# Altium PCB LP_ECG-X02.PcbDoc (part 1 of 2)
Units mil, origin at the board's own origin, x right, y up, seen from the top; angles counter-clockwise.
Board outline 960.05 x 640 mil, 2 copper layers (Top Layer, Bottom Layer), stack 5.556 mil thick; 71 components, 50 nets, 250 pads, 54 vias.
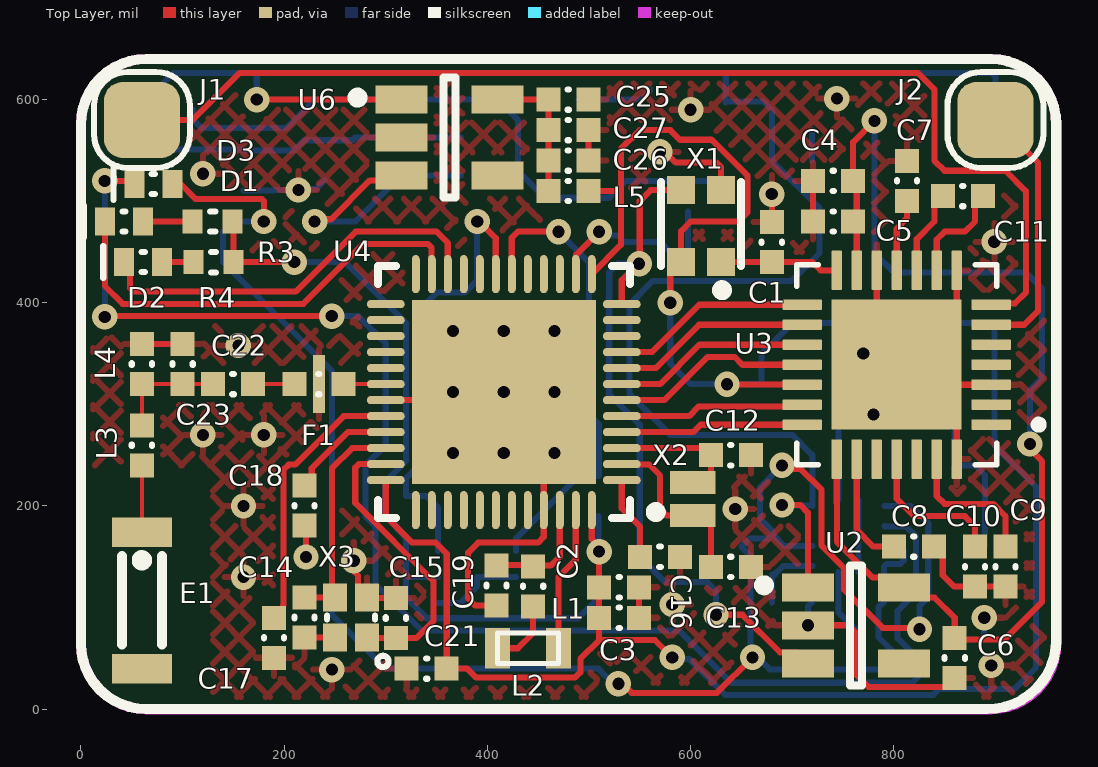
[diagram p0: Top Layer view]
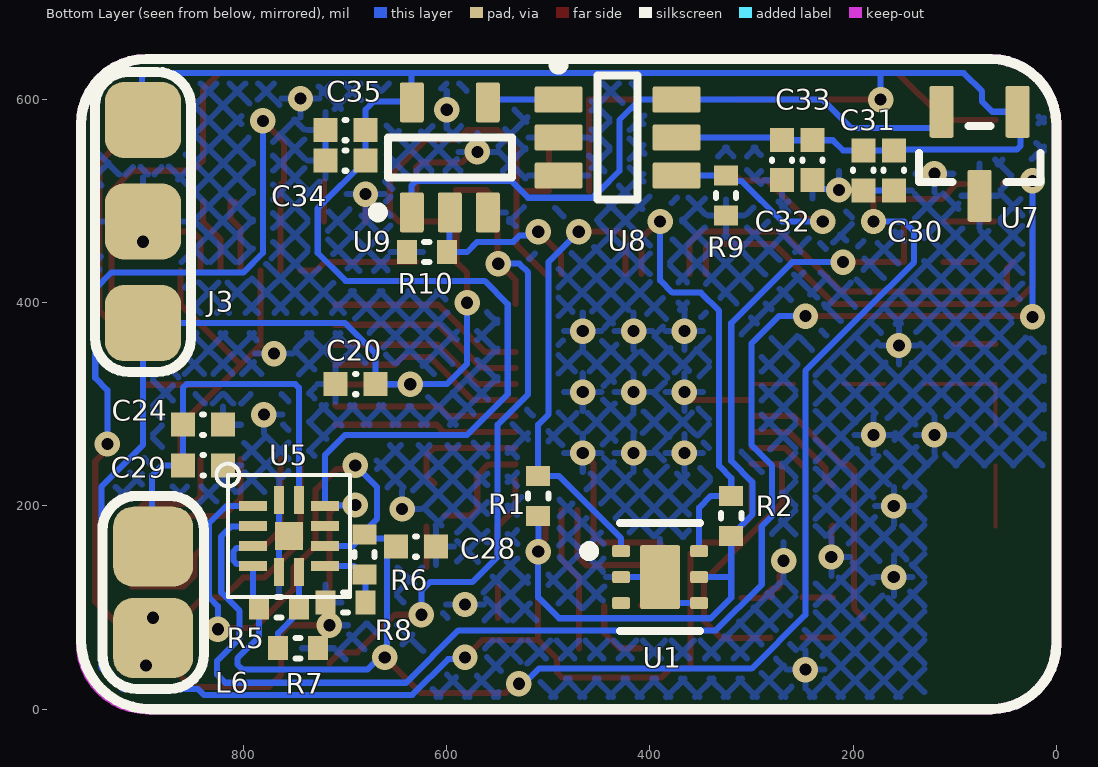
[diagram p1: Bottom Layer view, seen from below]
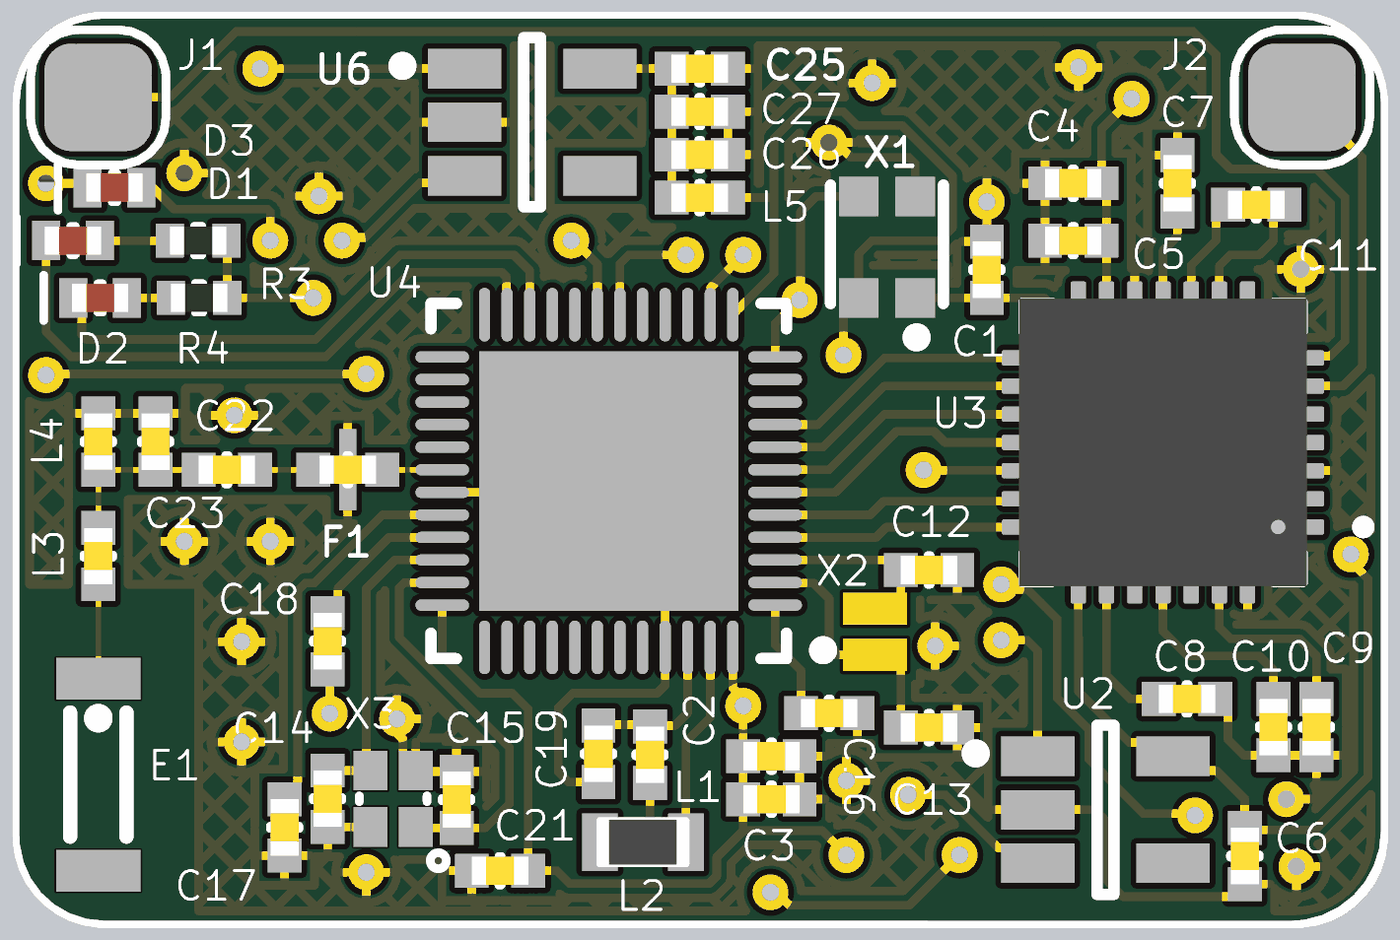
[diagram p2: 3D render of the assembled board from above, using the file's embedded part models]
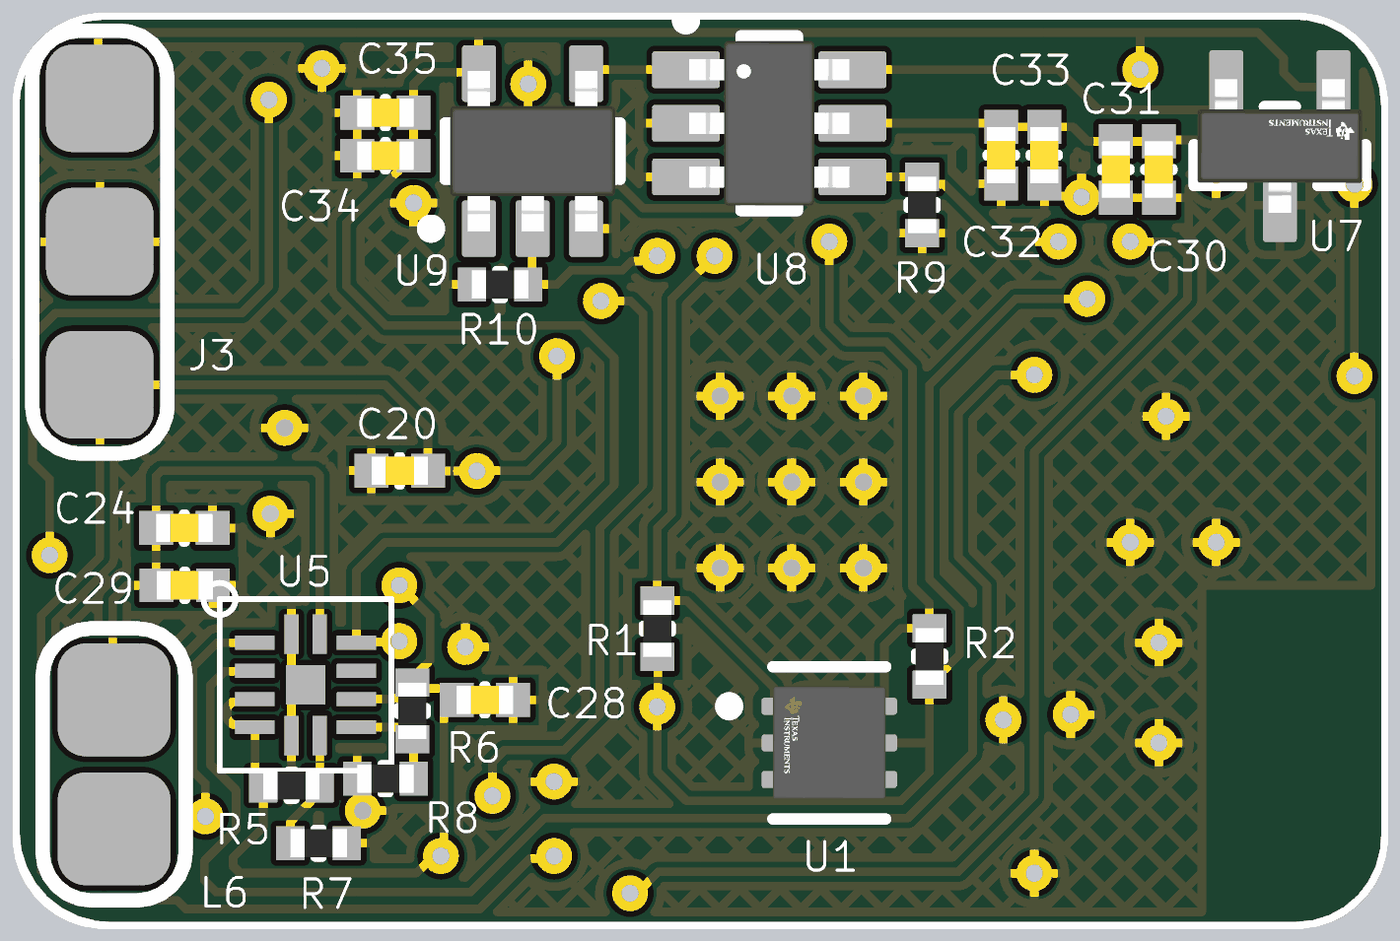
[diagram p3: 3D render of the assembled board from below, using the file's embedded part models]

## Layer stack, top to bottom
Top Solder: solder mask 1, SM-001, Dk 4
Top Layer: signal copper 1.378
Dielectric 1: prepreg 2.8, PP-006, Dk 4.1
Bottom Layer: signal copper 1.378
Bottom Solder: solder mask 1, SM-001, Dk 4

## Board outline
64.49,0 cw(c64.49,64.49) 0,64.49 0,575.51 cw(c64.49,575.51) 64.49,640 895.55,640 cw(c895.59,575.55) 960.05,575.59 960,64.49 cw(c895.51,64.49) 895.51,0

## Design rules (kind name [scope] priority, off if disabled: settings)
Clearance [All] p1: gap=6 ignorepadtopadclearanceinfootprint=FALSE except(4: Arc-Arc Arc-Track Arc-Fill Arc-Poly Arc-Region Track-Track Track-Fill Track-Poly Track-Region Fill-Fill Fill-Poly Fill-Region Poly-Poly Poly-Region Region-Region)
ComponentClearance [All] p1: gap=0 collisioncheckmode=3 verticalgap=100000 showdistances=FALSE
DiffPairsRouting [All] p1: maxlimit=10 minlimit=10 mostfreqgap=10 substack1={09ACA8DF-FEF3-4045-BFE0-9274A49A609C} toplayer_{09aca8df-fef3-4045-bfe0-9274a49a609c}_minwidth=15 toplayer_{09aca8df-fef3-4045-bfe0-9274a49a609c}_maxwidth=15 toplayer_{09aca8df-fef3-4045-bfe0-9274a49a609c}_prefwidth=15 bottomlayer_{09aca8df-fef3-4045-bfe0-9274a49a609c}_minwidth=15 bottomlayer_{09aca8df-fef3-4045-bfe0-9274a49a609c}_maxwidth=15 bottomlayer_{09aca8df-fef3-4045-bfe0-9274a49a609c}_prefwidth=15 toplayer_minwidth=15 toplayer_maxwidth=15 toplayer_prefwidth=15 bottomlayer_minwidth=15 bottomlayer_maxwidth=15 bottomlayer_prefwidth=15 substack2={F83B83AE-013F-46B0-B20B-87D2642F3418} toplayer_{f83b83ae-013f-46b0-b20b-87d2642f3418}_minwidth=15 toplayer_{f83b83ae-013f-46b0-b20b-87d2642f3418}_maxwidth=15 toplayer_{f83b83ae-013f-46b0-b20b-87d2642f3418}_prefwidth=15 bottomlayer_{f83b83ae-013f-46b0-b20b-87d2642f3418}_minwidth=15 bottomlayer_{f83b83ae-013f-46b0-b20b-87d2642f3418}_maxwidth=15 bottomlayer_{f83b83ae-013f-46b0-b20b-87d2642f3418}_prefwidth=15 maxuncoupledlength=500
HoleSize [All] p1: absolutevalues=TRUE maxlimit=200 minlimit=12 maxpercent=80.000 minpercent=20.000
MinimumSolderMaskSliver [All] p1: minsoldermaskwidth=6
PlaneClearance [All] p1: clearance=6
PlaneConnect [All] p1: planeconnectstyle=Relief reliefexpansion=6 reliefentries=4 reliefconductorwidth=6 reliefairgap=6
PolygonConnect [All] p1: connectstyle=Relief reliefconductorwidth=6 reliefentries=4 polygonreliefangle="90 Angle" airgapwidth=6
RoutingVias [All] p1: holewidth=16 width=30 viastyle="Through Hole" minholewidth=12 minwidth=12 maxholewidth=100 maxwidth=50
SilkToSilkClearance [All] p1: silktosilkclearance=6
SilkToSolderMaskClearance [IsPad] p1: minsilkscreentomaskgap=6 clearancetoexposedcopper=TRUE
SolderMaskExpansion [All] p1: expansion=4 istentingtop=FALSE
UnRoutedNet [All] p1: checkbadconnections=TRUE
Width [All] p1: maxlimit=200 minlimit=4 preferedwidth=6 substack1={09ACA8DF-FEF3-4045-BFE0-9274A49A609C} toplayer_{09aca8df-fef3-4045-bfe0-9274a49a609c}_minwidth=5.9 bottomlayer_{09aca8df-fef3-4045-bfe0-9274a49a609c}_minwidth=5.9 substack2={F83B83AE-013F-46B0-B20B-87D2642F3418} toplayer_{f83b83ae-013f-46b0-b20b-87d2642f3418}_minwidth=5.9 bottomlayer_{f83b83ae-013f-46b0-b20b-87d2642f3418}_minwidth=5.9
21 further rules are at their usual default settings.

## Classes and differential pairs
component class LP_ECG_ECG-X02: C1 C2 C3 C4 C5 C6 C7 C8 C9 C10 C11 J1 J2 U1 U2 U3 X1
component class LP_ECG_Power-X02: C24 C25 C26 C27 C28 C29 C30 C31 C32 C33 C34 C35 D3 J3 L5 L6 R5 R6 R7 R8 R9 R10 U5 U6 U7 U8 U9
component class LP_ECG_Main-X02: C12 C13 C14 C15 C16 C17 C18 C19 C20 C21 C22 C23 D1 D2 E1 F1 L1 L2 L3 L4 R1 R2 R3 R4 U4 X2 X3

## Components (designator, comment, footprint, x,y, rotation, side; value= is the part's Value field where it differs from the comment)
C1 "10pF" C0402 680,459.69 r90 top
C2 "1uF" C0402 529.68,120 r0 top
C3 "100nF" C0402 529.68,90 r180 top
C4 "1uF" C0402 740.32,520 r180 top
C5 "100nF" C0402 740.32,480 r0 top
C6 "10uF" C0402 860,50.31 r270 top
C7 "1nF" C0402 813,520 r270 top
C8 "10uF" C0402 819.68,160 r0 top
C9 "1uF" C0402 910,140.31 r270 top
C10 "10uF" C0402 880,140.31 r270 top
C11 "1uF" C0402 868,505 r180 top
C12 "20pF" C0402 639.68,250 r180 top
C13 "20pF" C0402 639.68,140 r180 top
C14 "12pF" C0402 220,90.31 r270 top
C15 "12pF" C0402 310,89.69 r90 top
C16 "100nF" C0402 570,150 r0 top
C17 "100pF" C0402 190,70.31 r270 top
C18 "100pF" C0402 220,200.31 r270 top
C19 "1uF" C0402 409,121.69 r90 top
C20 "10uF" C0402 689.68,320 r0 bottom
C21 "100nF" C0402 340.31,40 r180 top
C22 "1pF" C0402 149.69,320 r180 top
C23 "" C0402 100,339.69 r90 top
C24 "47nF" C0402 840,280 r180 bottom
C25 "10uF" C0402 479.69,600 r0 top
C26 "1uF" C0402 479.69,540 r0 top
C27 "100nF" C0402 479.69,570 r180 top
C28 "4.7uF" C0402 630.32,160 r180 bottom
C29 "6.8nF" C0402 839.68,240 r180 bottom
C30 "1uF" C0402 160,530.32 r270 bottom
C31 "100nF" C0402 190,530.32 r90 bottom
C32 "1uF" C0402 270,540.32 r270 bottom
C33 "100nF" C0402 240,540.32 r90 bottom
C34 "1uF" C0402 699.68,540 r0 bottom
C35 "100nF" C0402 699.68,570 r180 bottom
D1 "Orange" LED_0402 42.37,480 r180 top
D2 "Red" LED_0402 61.3,440 r180 top
D3 "Yellow" LED_0402 71.3,517 r180 top
E1 "2450AT18B100" 2450AT18B100 60,174.1 r270 top
F1 "2450FM07A0029" 2450FM07A0029 234.11,320 r180 top
J1 "ECG_SMD_CONNECTOR" ECG_CONNECTOR 60,580 r0 top
J2 "ECG_SMD_CONNECTOR" ECG_CONNECTOR 900,580 r0 top
J3 "SMD CONNECTOR FOR 40 mAh BATTERY" BATTERY_CONNECTOR 899,580 r270 bottom
L1 "15nH" L0402 445,121 r270 top
L2 "10uH" L0603 440,60 r0 top
L3 "0.0039uH" L0402 60,259.69 r270 top
L4 "0.0027uH" L0402 60,339.69 r270 top
L5 "1uH" L0402 479.69,510 r0 top
L6 "WIRELESS CHARGING COIL, RECEIVER" 760308101219 889,160 r180 bottom
R1 "10kR" R0402 510,209.69 r90 bottom
R2 "10kR" R0402 320,190.31 r90 bottom
R3 "422R" R0402 129.69,480 r180 top
R4 "422R" R0402 130.31,440 r180 top
R5 "0R" R0402 765.28,100.31 r180 bottom
R6 "0R" R0402 681,152.31 r90 bottom
R7 "0R" R0402 746.32,60 r180 bottom
R8 "0R" R0402 699.68,105 r0 bottom
R9 "1MR" R0402 325.2,505.51 r270 bottom
R10 "1MR" R0402 619.68,450 r180 bottom
U1 "TMP117AIDRVR" TMP117AIDRVR 390,130 r270 bottom
U2 "S-1318A18-M5T1U4" SOT-23-5 762.76,82.6 r0 top
U3 "MAX30003CTI+" QFN50P500X500X80-29N 802.91,339.06 r180 top
U4 "NRF52832-QFAA-R7" NRF52832-QFAA-R7 416.14,312.13 r0 top
U5 "LTC4124" 12-LQFN 755.43,170.47 r180 bottom
U6 "S-1318A30-M5T1U4" SOT-23-5 362.76,562.6 r0 top
U7 "DRV5032FBDBZR" FP-DBZ0003A-MFG 75.6,546.66 r270 bottom
U8 "SN74LVC1G57DBVR" DBV0006A_M 431.93,562.6 r180 bottom
U9 "SN74LVC1G80DBVR" DBV0005A_N 597,543.13 r90 bottom
X1 "OSCILLATOR-32.768KHZ" OM-7605-C8-32.768KHZ 610.32,475.43 r90 top
X2 "32.768 kHz" CRYSTAL_1MM2_X_1MM0 602,206.86 r270 top
X3 "32MHz" CRYSTAL_1MM6_X_1MM2 265.75,90.31 r90 top

## Footprints (in the part's own frame and the unit in brackets; to place one, negate y for a bottom-side part, rotate by r counter-clockwise, add the part's x,y. Pads: shape width x height; smd on the part's side, far side on the other; paste and mask are expansions set on the pad)
12-LQFN [mm] "12-LQFN Exposed Pad"
  rect 0.7x0.25 smd: 1(-0.9,0.75) 2(-0.9,0.25) 3(-0.9,-0.25) 4(-0.9,-0.75) 7(0.9,-0.75) 8(0.9,-0.25) 9(0.9,0.25) 10(0.9,0.75)
  rect 0.25x0.7 smd: 5(-0.25,-0.9) 6(0.25,-0.9) 11(0.25,0.9) 12(-0.25,0.9)
  rect 0.7x0.7 smd: 13(0,0)
  silkscreen extent -1.81,-1.52 1.52,1.81, body extent -1.02,-1.02 1.02,1.02, height 0.25
2450AT18B100 [mm] "2.4GHz Mini Antenna SMD, 50 ohm Resistence"
  rect 0.74x1.5 smd mask+0.03: 1(0,0) 2(3.406,0)
  silkscreen extent 0.57,-0.5 2.8,0.5, body extent -0.05,-0.9 3.35,0.9, height 1.4
2450FM07A0029 [mm] "Ultra Miniature 2.45 GHz Impedance Matched Low Pass Filter for nRF52832"
  rect 0.6x0.6 smd: 1(-0.613,0) 2(0.613,0)
  rect 0.3x1.45 smd: 3(0,0)
  silkscreen extent -0.02,-0.25 0.02,0.25, body extent -0.5,-0.25 0.5,0.25, height 0.55
760308101219 [mm] "WE-WPCC WIRELESS POWER TRANSFER RECEIVER COIL"
  rrect50% 2x2 smd: 1(0,0) 2(0,-2.286)
  silkscreen extent -1.27,-3.56 1.27,1.27
BATTERY_CONNECTOR [mil] "SMD Battery connector"
  rrect50% 75x75 smd: 1(0,0) 2(100,0) 3(200,0)
  silkscreen extent -47,-47 248,47
C0402 [mm]
  rect 0.6x0.6 smd: 1(-0.5,0) 2(0.5,0)
  silkscreen extent -0.02,-0.25 0.02,0.25, body extent -0.5,-0.25 0.5,0.25, height 0.55
CRYSTAL_1MM2_X_1MM0 [mm] "Crystal 1.2 x 1.0 x 0.35mm"
  rect 0.575x1.14 smd paste-0.5 mask+0.06: 1(-0.41,0) 2(0.41,0)
  body extent -0.6,-0.5 0.6,0.5, height 0.35
CRYSTAL_1MM6_X_1MM2 [mm] "1.6 x 1.2 x 0.35mm 4-pin crystal"
  rect 0.7x0.6 smd mask+0.036: 1(-0.5,-0.4) 2(0.5,-0.4) 3(0.5,0.4) 4(-0.5,0.4)
  silkscreen extent -1.24,-0.94 0.05,0.6, body extent -0.8,-0.6 0.8,0.6, height 0.35
DBV0005A_N [mm] "SOT23, 5-Leads, Body 3.05x1.75mm, Pitch 0.95mm, IPC Medium Density"
  rrect17% 1x0.6 smd: 1(-1.375,0.95) 2(-1.375,0) 3(-1.375,-0.95) 4(1.375,-0.95) 5(1.375,0.95)
  silkscreen extent -1.5,-1.55 0.5,1.93, body extent -1.42,-1.46 1.42,1.46, height 1.08
DBV0006A_M [mm] "SOT23, 6-Leads, Body 3.05x1.75mm, Pitch 0.95mm, IPC Low Density"
  rrect15% 1.2x0.65 smd: 1(-1.475,0.95) 2(-1.475,0) 3(-1.475,-0.95) 4(1.475,-0.95) 5(1.475,0) 6(1.475,0.95)
  silkscreen extent -1.6,-1.55 0.5,1.95, body extent -1.42,-1.46 1.42,1.46, height 1.11
ECG_CONNECTOR [mil] "Surface Mount ECG Connector"
  rrect50% 75x75 smd: 1(0,0)
  silkscreen extent -47,-47 47,47
FP-DBZ0003A-MFG [mm]
  rrect17% 1.3x0.6 smd paste+0 mask+0: 1(-1.05,0.95) 2(-1.05,-0.95) 3(1.05,0)
  silkscreen extent -0.7,-1.52 0.7,1.52, body extent -1.18,-1.46 1.18,1.46, height 1.12
L0402 [mm]
  rect 0.6x0.6 smd: 1(-0.5,0) 2(0.5,0)
  silkscreen extent -0.02,-0.25 0.02,0.25, body extent -0.5,-0.25 0.5,0.25, height 0.55
L0603 [mil] "surface mount inductor 0603"
  rect 25x40 smd: 1(-30,0) 2(30,0)
  silkscreen extent -30,-15 30,15, body extent -31,-16 32,16, height 39
LED_0402 [mm] "0402 w/ LED mark"
  rect 0.5x0.7 smd: A(-0.475,0) K(0.475,0)
  silkscreen extent -0.04,-0.4 1,0.4, body extent -0.5,-0.25 0.5,0.25, height 0.35
NRF52832-QFAA-R7 [mm]
  oval 0.95x0.2 smd: 1(2.95,-2.2) 2(2.95,-1.8) 3(2.95,-1.4) 4(2.95,-1) 5(2.95,-0.6) 6(2.95,-0.2) 7(2.95,0.2) 8(2.95,0.6) 9(2.95,1) 10(2.95,1.4) 11(2.95,1.8) 12(2.95,2.2) 25(-2.95,2.2) 26(-2.95,1.8) 27(-2.95,1.4) 28(-2.95,1) 29(-2.95,0.6) 30(-2.95,0.2) 31(-2.95,-0.2) 32(-2.95,-0.6) 33(-2.95,-1) 34(-2.95,-1.4) 35(-2.95,-1.8) 36(-2.95,-2.2)
  oval 0.2x0.95 smd: 13(2.2,2.95) 14(1.8,2.95) 15(1.4,2.95) 16(1,2.95) 17(0.6,2.95) 18(0.2,2.95) 19(-0.2,2.95) 20(-0.6,2.95) 21(-1,2.95) 22(-1.4,2.95) 23(-1.8,2.95) 24(-2.2,2.95) 37(-2.2,-2.95) 38(-1.8,-2.95) 39(-1.4,-2.95) 40(-1,-2.95) 41(-0.6,-2.95) 42(-0.2,-2.95) 43(0.2,-2.95) 44(0.6,-2.95) 45(1,-2.95) 46(1.4,-2.95) 47(1.8,-2.95) 48(2.2,-2.95)
  rect 4.6x4.6 smd: 49(0,0)
  silkscreen extent -3.15,-3.15 3.92,3.15, body extent -3,-3 3,3, height 0.9
OM-7605-C8-32.768KHZ [mm] "2.0 MM X 1.2 MM X 0.7 MM, 4-SMD"
  rect 0.7x0.7 smd paste+0 mask+0: 1(-0.9,-0.5) 2(0.9,-0.5) 3(0.9,0.5) 4(-0.9,0.5)
  silkscreen extent -1.72,-1 1.1,1, body extent -1.01,-0.6 1.01,0.6, height 0.7
QFN50P500X500X80-29N [mm]
  rrect25% 0.99x0.27 smd: 1(-2.36,1.5) 2(-2.36,1) 3(-2.36,0.5) 4(-2.36,0) 5(-2.36,-0.5) 6(-2.36,-1) 7(-2.36,-1.5) 15(2.36,-1.5) 16(2.36,-1) 17(2.36,-0.5) 18(2.36,0) 19(2.36,0.5) 20(2.36,1) 21(2.36,1.5)
  rrect25% 0.27x0.99 smd: 8(-1.5,-2.36) 9(-1,-2.36) 10(-0.5,-2.36) 11(0,-2.36) 12(0.5,-2.36) 13(1,-2.36) 14(1.5,-2.36) 22(1.5,2.36) 23(1,2.36) 24(0.5,2.36) 25(0,2.36) 26(-0.5,2.36) 27(-1,2.36) 28(-1.5,2.36)
  rect 3.25x3.25 smd paste-3: 29(0,0)
  silkscreen extent -3.65,-2.5 2.5,2.5, body extent -2.55,-2.55 2.55,2.55, height 0.81
R0402 [mm]
  rect 0.5x0.6 smd: 1(-0.5,0) 2(0.5,0)
  silkscreen extent -0.06,-0.25 0.06,0.25, body extent -0.5,-0.25 0.5,0.25, height 0.35
SOT-23-5 [mm] "SOT23, 5-Leads, Body 2.9x1.6mm, Pitch 0.95mm, Lead Span 2.8mm, IPC Low Density"
  rect 1.3x0.7 smd: 1(-1.2,0.95) 2(-1.2,0) 3(-1.2,-0.95) 4(1.2,-0.95) 5(1.2,0.95)
  silkscreen extent -2.42,-1.5 0.15,1.5, body extent -0.83,-1.49 0.83,1.5, height 1.19
TMP117AIDRVR [mm]
  rrect33% 0.3x0.45 smd paste+0 mask+0: 1(-0.65,-0.975) 2(0,-0.975) 3(0.65,-0.975) 4(0.65,0.975) 5(0,0.975) 6(-0.65,0.975)
  rrect10% 1.6x1 smd paste-1000 mask+0: 7(0,0)
  silkscreen extent -1.35,-1.9 1.35,1, body extent -1,-1 1,1, height 0.8

## Part data
C1: library part C-0402(1005), "Ceramic Capacitor, Multilayer, Ceramic, 50V, 5% +Tol, 5% -Tol, C0G, 30ppm/Cel TC, 0.00001uF, Surface Mount, 0402", Capacitor Type=Ceramic, Manufacturer=Murata, Manufacturer Part Number=GJM1555C1H100JB01D, Max Operating Temperature=125°C, Min Operating Temperature=-55°C, Negative Tolerance=5%, Package Shape=Rectangular, Package Style=SMTMeter, Rated DC Voltage (URdc)=50V, Supplier Part Number 1=490-3113-1-ND, Temperature Characteristics Code=C0G, Capacitance=10pF, Category="Ceramic Capacitors", ComponentLink1Description=https://datasheet.ciiva.com:443/pdfs/VipMasterIC/IC/MURE/MURE-S-A0004378008/MURE-S-A0004383508-1.pdf?src-supplier=IHS+Markit, ComponentLink1URL=https://datasheet.ciiva.com:443/pdfs/VipMasterIC/IC/MURE/MURE-S-A0004378008/MURE-S-A0004383508-1.pdf?src-supplier=IHS+Markit, ComponentLink2Description=https://datasheet.ciiva.com/18183/getdatasheetpartid-228488-18183804.pdf?src-supplier=Verical, ComponentLink2URL=https://datasheet.ciiva.com/18183/getdatasheetpartid-228488-18183804.pdf?src-supplier=Verical, ComponentLink3Description=https://datasheet.ciiva.com/165/partnumbering-e-01-165051.pdf?src-supplier=Digi-Key, ComponentLink3URL=https://datasheet.ciiva.com/165/partnumbering-e-01-165051.pdf?src-supplier=Digi-Key, ComponentLink4Description=https://datasheet.ciiva.com/29542/partnumbering-e-01-29542760.pdf?src-supplier=Digi-Key, ComponentLink4URL=https://datasheet.ciiva.com/29542/partnumbering-e-01-29542760.pdf?src-supplier=Digi-Key, ComponentLink5Description=https://datasheet.ciiva.com/29542/partnumbering-e-01-29542761.pdf?src-supplier=Digi-Key, ComponentLink5URL=https://datasheet.ciiva.com/29542/partnumbering-e-01-29542761.pdf?src-supplier=Digi-Key, ComponentLink6Description=https://datasheet.ciiva.com/11607/product-11607356.pdf?src-supplier=Avnet, ComponentLink6URL=https://datasheet.ciiva.com/11607/product-11607356.pdf?src-supplier=Avnet, Dielectric Material=Ceramic, Height=0.5mm, JESD-609 Code=e3, Length=1mm, Mount="Surface Mount", Multilayer=Yes, Number of Pins=2, Packaging="Tape and Reel", Positive Tolerance=5%, Pricing 1="1=0.25000, 10=0.17200, 50=0.10300, 100=0.08690, 500=0.05948, 1000=0.05262, 2500=0.05034, 5000=0.04576 (USD)", REACH SVHC=Yes, RoHS=Yes, RoHS Compliant=Yes, Size Code=0402, Stock 1=1065586, Supplier 1=Digi-Key, Terminal Finish=Nickel, Termination=Wraparound, Width=0.5mm
C2 C4 C9 C11 C19 C26 C30 C32 C34: library part C-0402(1005), "Ceramic Capacitor, Multilayer, Ceramic, 6.3V, 20% +Tol, 20% -Tol, X5R, 15% TC, 1uF, Surface Mount, 0402", Case Code (Imperial)=0402, Case Code (Metric)=1005, Dielectric=X5R, Manufacturer=Yageo, Manufacturer Part Number=CC0402MRX5R5BB105, Max Operating Temperature=85°C, Min Operating Temperature=-55°C, Package Quantity=1, Supplier Part Number 1=311-1441-1-ND, Tolerance=20%, Voltage Rating=6.3V, Capacitance=1uF, Case/Package=0402, Category="Ceramic Capacitors", ComponentLink1Description=https://datasheet.ciiva.com/169/product-169683.pdf, ComponentLink1URL=https://datasheet.ciiva.com/169/product-169683.pdf, ComponentLink2Description=https://datasheet.ciiva.com:443/pdfs/VipMasterIC/IC/YAGO/YAGO-S-A0006851646/YAGO-S-A0006851646-1.pdf?src-supplier=IHS+Markit, ComponentLink2URL=https://datasheet.ciiva.com:443/pdfs/VipMasterIC/IC/YAGO/YAGO-S-A0006851646/YAGO-S-A0006851646-1.pdf?src-supplier=IHS+Markit, ComponentLink3Description=https://datasheet.ciiva.com/176/mlccorderingcode-176806.pdf?src-supplier=Digi-Key, ComponentLink3URL=https://datasheet.ciiva.com/176/mlccorderingcode-176806.pdf?src-supplier=Digi-Key, ComponentLink4Description=https://datasheet.ciiva.com/176/mlccorderingcode-176807.pdf?src-supplier=Digi-Key, ComponentLink4URL=https://datasheet.ciiva.com/176/mlccorderingcode-176807.pdf?src-supplier=Digi-Key, ComponentLink5Description=https://datasheet.ciiva.com/176/mlccorderingcode-176808.pdf?src-supplier=Digi-Key, ComponentLink5URL=https://datasheet.ciiva.com/176/mlccorderingcode-176808.pdf?src-supplier=Digi-Key, Composition=Ceramic, Depth=0.5mm, Dissipation Factor=10%, Halogen Free="Halogen Free", Height=0.5mm, Lead Free="Lead Free", Length=1mm, Mount="Surface Mount", Number of Pins=2, Packaging="Tape and Reel", Pricing 1="1=0.13000, 10=0.08900, 100=0.04200, 500=0.02946, 1000=0.02439, 2500=0.02270, 5000=0.02076 (USD)", RoHS=Yes, Stock 1=16697, Supplier 1=Digi-Key, Termination=SMD/SMT, Thickness=0.022inch, Voltage Rating (DC)=6.3V, Width=0.5mm
C3 C5 C16 C27 C31 C33 C35: library part C-0402(1005), "Ceramic Capacitor, Multilayer, Ceramic, 25V, 10% +Tol, 10% -Tol, X5R, 15% TC, 0.1uF, Surface Mount, 0402", Case Code (Imperial)=0402, Case Code (Metric)=1005, Dielectric=X5R, Manufacturer="Taiyo Yuden", Manufacturer Part Number=TMK105BJ104KV-F, Max Operating Temperature=85°C, Min Operating Temperature=-55°C, Package Quantity=1, Supplier Part Number 1=587-1456-1-ND, Tolerance=10%, Voltage=25V, Capacitance=100nF, Case/Package=0402, Category="Ceramic Capacitors", ComponentLink1Description=https://datasheet.ciiva.com/169/product-169683.pdf, ComponentLink1URL=https://datasheet.ciiva.com/169/product-169683.pdf, ComponentLink2Description=https://datasheet.ciiva.com:443/pdfs/VipMasterIC/IC/TAIY/TAIY-S-A0009103435/TAIY-S-A0009103038-1.pdf?src-supplier=IHS+Markit, ComponentLink2URL=https://datasheet.ciiva.com:443/pdfs/VipMasterIC/IC/TAIY/TAIY-S-A0009103435/TAIY-S-A0009103038-1.pdf?src-supplier=IHS+Markit, ComponentLink3Description=https://datasheet.ciiva.com/30051/25tmk105bj104kv-f-30051094.pdf?src-supplier=Onlinecomponents.com, ComponentLink3URL=https://datasheet.ciiva.com/30051/25tmk105bj104kv-f-30051094.pdf?src-supplier=Onlinecomponents.com, ComponentLink4Description=https://datasheet.ciiva.com/15922/28tmk105bj104kv-f-15922315.pdf?src-supplier=Onlinecomponents.com, ComponentLink4URL=https://datasheet.ciiva.com/15922/28tmk105bj104kv-f-15922315.pdf?src-supplier=Onlinecomponents.com, ComponentLink5Description=https://datasheet.ciiva.com/131/tmk105bj104kv-f-ss-131420.pdf?src-supplier=Digi-Key, ComponentLink5URL=https://datasheet.ciiva.com/131/tmk105bj104kv-f-ss-131420.pdf?src-supplier=Digi-Key, ComponentLink6Description=https://datasheet.ciiva.com/22768/1693457-22768649.pdf?src-supplier=Farnell, ComponentLink6URL=https://datasheet.ciiva.com/22768/1693457-22768649.pdf?src-supplier=Farnell, Composition=Ceramic, Depth=0.5mm, Halogen Free="Halogen Free", Height=0.5mm, Lead Free="Lead Free", Length=1mm, Mount="Surface Mount", Number of Pins=2, Packaging="Tape and Reel", Pricing 1="1=0.10000, 10=0.04600, 100=0.02050, 500=0.01464, 1000=0.01150, 2500=0.01045, 5000=0.00961 (USD)", REACH SVHC="No SVHC", RoHS=Yes, Stock 1=27456801, Supplier 1=Digi-Key, Termination=SMD/SMT, Thickness=0.022inch, Voltage Rating=25V, Voltage Rating (DC)=25V, Weight=2.3E-05oz, Width=0.5mm
C6 C8 C10 C20 C25: library part C-0402(1005), "Ceramic Capacitor, Non-polarized, Multilayer, Ceramic, 10V, 20% +Tol, 20% -Tol, X5R, 15% TC, 10uF, Surface Mount, 0402", Capacitor Type=Ceramic, Manufacturer="Kyocera AVX", Manufacturer Part Number=0402ZD106MAT2A, Max Operating Temperature=85°C, Min Operating Temperature=-55°C, Negative Tolerance=20%, Package Shape=Rectangular, Rated DC Voltage (URdc)=10V, Supplier Part Number 1=478-10052-1-ND, Temperature Characteristics Code=X5R, Capacitance=10uF, Category="Ceramic Capacitors", ComponentLink1Description=https://datasheet.ciiva.com/169/product-169683.pdf, ComponentLink1URL=https://datasheet.ciiva.com/169/product-169683.pdf, ComponentLink2Description=https://datasheet.ciiva.com:443/pdfs/VipMasterIC/IC/AVXC/AVXC-S-A0009640604/AVXC-S-A0009640604-1.pdf?src-supplier=IHS+Markit, ComponentLink2URL=https://datasheet.ciiva.com:443/pdfs/VipMasterIC/IC/AVXC/AVXC-S-A0009640604/AVXC-S-A0009640604-1.pdf?src-supplier=IHS+Markit, ComponentLink3Description=http://datasheets.avx.com/cx5r.pdf?src-supplier=Digi-Key, ComponentLink3URL=http://datasheets.avx.com/cx5r.pdf?src-supplier=Digi-Key, ComponentLink4Description=http://catalogs.avx.com/SurfaceMount.pdf?src-supplier=Digi-Key, ComponentLink4URL=http://catalogs.avx.com/SurfaceMount.pdf?src-supplier=Digi-Key, Dielectric Material=Ceramic, JESD-609 Code=e3, Mount="Surface Mount", Multilayer=Yes, Number of Pins=2, Packaging="Tape and Reel", Positive Tolerance=20%, Pricing 1="1=0.85000, 10=0.62400, 50=0.49900, 100=0.42770, 500=0.33858, 1000=0.28512, 2500=0.26730, 5000=0.24948 (USD)", RoHS=No, Size Code=0402, Stock 1=111382, Supplier 1=Digi-Key, Terminal Finish=Nickel, Termination=Wraparound
C7: library part C-0402(1005), "Ceramic Capacitor, Multilayer, Ceramic, 10V, 5% +Tol, 5% -Tol, C0G, -/+30ppm/Cel TC, 0.001uF, 0402", Case Code (Imperial)=0402, Case Code (Metric)=1005, Manufacturer=KEMET, Manufacturer Part Number=C0402C102J8GAC7867, Max Operating Temperature=125°C, Min Operating Temperature=-55°C, Supplier Part Number 1=399-14868-1-ND, Tolerance=5%, Voltage Rating=10V, Capacitance=1nF, Case/Package=0402, Category="Ceramic Capacitors", ComponentLink1Description=https://datasheet.ciiva.com/169/product-169683.pdf, ComponentLink1URL=https://datasheet.ciiva.com/169/product-169683.pdf, ComponentLink2Description=https://datasheet.ciiva.com:443/pdfs/VipMasterIC/IC/KEME/KEMES02331/KEMES02331-1.pdf?src-supplier=IHS+Markit, ComponentLink2URL=https://datasheet.ciiva.com:443/pdfs/VipMasterIC/IC/KEME/KEMES02331/KEMES02331-1.pdf?src-supplier=IHS+Markit, ComponentLink3Description=https://api.kemet.com/component-edge/download/datasheet/C0402C102J8GAC7867.pdf?src-supplier=Digi-Key, ComponentLink3URL=https://api.kemet.com/component-edge/download/datasheet/C0402C102J8GAC7867.pdf?src-supplier=Digi-Key, Mount="Surface Mount", Packaging="Tape and Reel", Pricing 1="1=0.26000, 10=0.18100, 100=0.10240, 500=0.07226, 1000=0.06322, 2500=0.06022, 5000=0.05570 (USD)", RoHS=No, Stock 1=20757, Supplier 1=Digi-Key
C12 C13: library part C-0402(1005), "Ceramic Capacitor, Multilayer, Ceramic, 50V, 1% +Tol, 1% -Tol, C0G, -/+30ppm/Cel TC, 0.00002uF, Surface Mount, 0402", Capacitor Type=Ceramic, Manufacturer=Murata, Manufacturer Part Number=GJM1555C1H200FB01D, Max Operating Temperature=125°C, Min Operating Temperature=-55°C, Negative Tolerance=1%, Package Shape=Rectangular, Rated DC Voltage (URdc)=50V, Supplier Part Number 1=490-11204-1-ND, Temperature Characteristics Code=C0G, Capacitance=20pF, Category="Ceramic Capacitors", ComponentLink1Description=https://datasheet.ciiva.com:443/pdfs/VipMasterIC/IC/MURE/MURE-S-A0004378008/MURE-S-A0004383710-1.pdf?src-supplier=IHS+Markit, ComponentLink1URL=https://datasheet.ciiva.com:443/pdfs/VipMasterIC/IC/MURE/MURE-S-A0004378008/MURE-S-A0004383710-1.pdf?src-supplier=IHS+Markit, ComponentLink2Description=http://www.farnell.com/datasheets/2867762.pdf?src-supplier=Farnell, ComponentLink2URL=http://www.farnell.com/datasheets/2867762.pdf?src-supplier=Farnell, ComponentLink3Description=http://www.mouser.com/ds/2/281/c02e-2905.pdf?src-supplier=Mouser, ComponentLink3URL=http://www.mouser.com/ds/2/281/c02e-2905.pdf?src-supplier=Mouser, ComponentLink4Description=http://www.murata.com/products/catalog/pdf/c02e.pdf?src-supplier=Avnet, ComponentLink4URL=http://www.murata.com/products/catalog/pdf/c02e.pdf?src-supplier=Avnet, ComponentLink5Description=http://www.farnell.com/datasheets/2867762.pdf?src-supplier=Newark, ComponentLink5URL=http://www.farnell.com/datasheets/2867762.pdf?src-supplier=Newark, ComponentLink6Description=http://www.farnell.com/datasheets/2867762.pdf?src-supplier=Element14, ComponentLink6URL=http://www.farnell.com/datasheets/2867762.pdf?src-supplier=Element14, ComponentLink7Description=http://search.murata.co.jp/Ceramy/image/img/A01X/G101/ENG/GJM1555C1H200FB01-01.pdf?src-supplier=Digi-Key, ComponentLink7URL=http://search.murata.co.jp/Ceramy/image/img/A01X/G101/ENG/GJM1555C1H200FB01-01.pdf?src-supplier=Digi-Key, Dielectric Material=Ceramic, JESD-609 Code=e3, Mount="Surface Mount", Multilayer=Yes, Number of Pins=2, Packaging="Tape and Reel", Positive Tolerance=1%, Pricing 1="1=0.22000, 10=0.15200, 50=0.09140, 100=0.07710, 500=0.05278, 1000=0.04669, 2500=0.04466, 5000=0.04060 (USD)", RoHS=Yes, Size Code=0402, Stock 1=136231, Supplier 1=Digi-Key, Terminal Finish=Nickel, Termination=Wraparound
C14 C15: library part C-0402(1005), "Ceramic Capacitor, Multilayer, Ceramic, 50V, 1% +Tol, 1% -Tol, C0G, 30ppm/Cel TC, 0.000012uF, Surface Mount, 0402", Case Code (Imperial)=0402, Case Code (Metric)=1005, Dielectric=C0G, Manufacturer="Kyocera AVX", Manufacturer Part Number=04025U120FAT2A, Max Operating Temperature=125°C, Min Operating Temperature=-55°C, Package Quantity=10000, Supplier Part Number 1=478-10136-1-ND, Tolerance=1%, Voltage Rating=50V, Capacitance=12pF, Case/Package=0402, Category="Ceramic Capacitors", ComponentLink1Description=https://datasheet.ciiva.com/169/product-169683.pdf, ComponentLink1URL=https://datasheet.ciiva.com/169/product-169683.pdf, ComponentLink2Description=https://datasheet.ciiva.com:443/pdfs/VipMasterIC/IC/AVXC/AVXC-S-A0008668660/AVXC-S-A0008668660-1.pdf?src-supplier=IHS+Markit, ComponentLink2URL=https://datasheet.ciiva.com:443/pdfs/VipMasterIC/IC/AVXC/AVXC-S-A0008668660/AVXC-S-A0008668660-1.pdf?src-supplier=IHS+Markit, ComponentLink3Description=https://datasheet.ciiva.com/16327/useries-16327642.pdf?src-supplier=Future+Electronics, ComponentLink3URL=https://datasheet.ciiva.com/16327/useries-16327642.pdf?src-supplier=Future+Electronics, ComponentLink4Description=https://datasheet.ciiva.com/11568/useries-11568940.pdf?src-supplier=Avnet, ComponentLink4URL=https://datasheet.ciiva.com/11568/useries-11568940.pdf?src-supplier=Avnet, Composition=Ceramic, Depth=0.5mm, Height=0.02mm, Lead Free="Lead Free", Length=1mm, Mount="Surface Mount", Packaging="Tape and Reel", Pricing 1="1=0.33000, 10=0.22700, 100=0.13630, 500=0.10220, 1000=0.08630, 2500=0.08176, 5000=0.07721 (USD)", Radiation Hardening=No, RoHS=Yes, Stock 1=30880, Supplier 1=Digi-Key, Termination=SMD/SMT, Thickness=0.022inch, Voltage Rating (DC)=50V, Weight=2.3E-05oz, Width=0.02inch
C17 C18: library part C-0402(1005), "Ceramic Capacitor, Multilayer, Ceramic, 50V, 1% +Tol, 1% -Tol, C0G, 30ppm/Cel TC, 0.0001uF, Surface Mount, 0402", Case Code (Imperial)=0402, Case Code (Metric)=1005, Dielectric=C0G, Manufacturer=Yageo, Manufacturer Part Number=CC0402FRNPO9BN101, Max Operating Temperature=125°C, Min Operating Temperature=-55°C, Package Quantity=10000, Supplier Part Number 1=311-3329-1-ND, Tolerance=1%, Voltage Rating=50V, Capacitance=100pF, Case/Package=0402, Category="Ceramic Capacitors", ComponentLink1Description=https://datasheet.ciiva.com/169/product-169683.pdf, ComponentLink1URL=https://datasheet.ciiva.com/169/product-169683.pdf, ComponentLink2Description=https://datasheet.ciiva.com:443/pdfs/VipMasterIC/IC/YAGO/YAGO-S-A0009251638/YAGO-S-A0009251638-1.pdf?src-supplier=IHS+Markit, ComponentLink2URL=https://datasheet.ciiva.com:443/pdfs/VipMasterIC/IC/YAGO/YAGO-S-A0009251638/YAGO-S-A0009251638-1.pdf?src-supplier=IHS+Markit, ComponentLink3Description=http://www.mouser.com/ds/2/447/Yageo_UPY-GP_NP0_16V-to-50V_9-358835.pdf?src-supplier=Mouser, ComponentLink3URL=http://www.mouser.com/ds/2/447/Yageo_UPY-GP_NP0_16V-to-50V_9-358835.pdf?src-supplier=Mouser, ComponentLink4Description=http://components.arrow.com/part/dataview/0323_00775990?src-supplier=Arrow+Europe, ComponentLink4URL=http://components.arrow.com/part/dataview/0323_00775990?src-supplier=Arrow+Europe, ComponentLink5Description=http://www.yageo.com/NewPortal/yageodocoutput?fileName=/pdf/MLCC/UPY-GP_NP0_16V-to-50V_14.pdf&src-supplier=Digi-Key, ComponentLink5URL=http://www.yageo.com/NewPortal/yageodocoutput?fileName=/pdf/MLCC/UPY-GP_NP0_16V-to-50V_14.pdf&src-supplier=Digi-Key, ComponentLink6Description=http://www.yageo.com/documents/recent/UPY-GP_NP0_16V-to-50V_16.pdf?src-supplier=Digi-Key, ComponentLink6URL=http://www.yageo.com/documents/recent/UPY-GP_NP0_16V-to-50V_16.pdf?src-supplier=Digi-Key, ComponentLink7Description=http://www.yageo.com/documents/recent/UPY-GP_NP0_16V-to-50V_9.pdf?src-supplier=Future+Electronics, ComponentLink7URL=http://www.yageo.com/documents/recent/UPY-GP_NP0_16V-to-50V_9.pdf?src-supplier=Future+Electronics, Composition=Ceramic, Depth=0.5mm, Lead Free="Lead Free", Length=1mm, Mount="Surface Mount", Packaging="Tape and Reel", Pricing 1="1=0.11000, 10=0.08200, 100=0.03840, 500=0.02690, 1000=0.02228, 2500=0.02073, 5000=0.01897 (USD)", RoHS=Yes, Stock 1=22812, Supplier 1=Digi-Key, Termination=SMD/SMT, Thickness=0.022inch, Voltage Rating (DC)=50V, Width=0.02inch
C21: library part C-0402(1005), "Ceramic Capacitor, Multilayer, Ceramic, 25V, 10% +Tol, 10% -Tol, X5R, 15% TC, 0.1uF, Surface Mount, 0402", Capacitor Type=Ceramic, Manufacturer="Taiyo Yuden", Manufacturer Part Number=TMK105BJ104KV-F, Max Operating Temperature=85°C, Min Operating Temperature=-55°C, Negative Tolerance=10%, Package Shape=Rectangular, Package Style=SMTMeter, Rated DC Voltage (URdc)=25V, Supplier Part Number 1=587-1456-1-ND, Temperature Characteristics Code=X5R, Capacitance=100nF, Category="Ceramic Capacitors", ComponentLink1Description=https://datasheet.ciiva.com/169/product-169683.pdf, ComponentLink1URL=https://datasheet.ciiva.com/169/product-169683.pdf, ComponentLink2Description=https://datasheet.ciiva.com:443/pdfs/VipMasterIC/IC/TAIY/TAIY-S-A0009103435/TAIY-S-A0009103038-1.pdf?src-supplier=IHS+Markit, ComponentLink2URL=https://datasheet.ciiva.com:443/pdfs/VipMasterIC/IC/TAIY/TAIY-S-A0009103435/TAIY-S-A0009103038-1.pdf?src-supplier=IHS+Markit, ComponentLink3Description=https://datasheet.ciiva.com/30051/25tmk105bj104kv-f-30051094.pdf?src-supplier=Onlinecomponents.com, ComponentLink3URL=https://datasheet.ciiva.com/30051/25tmk105bj104kv-f-30051094.pdf?src-supplier=Onlinecomponents.com, ComponentLink4Description=https://datasheet.ciiva.com/15922/28tmk105bj104kv-f-15922315.pdf?src-supplier=Onlinecomponents.com, ComponentLink4URL=https://datasheet.ciiva.com/15922/28tmk105bj104kv-f-15922315.pdf?src-supplier=Onlinecomponents.com, ComponentLink5Description=https://datasheet.ciiva.com/131/tmk105bj104kv-f-ss-131420.pdf?src-supplier=Digi-Key, ComponentLink5URL=https://datasheet.ciiva.com/131/tmk105bj104kv-f-ss-131420.pdf?src-supplier=Digi-Key, ComponentLink6Description=https://datasheet.ciiva.com/22768/1693457-22768649.pdf?src-supplier=Farnell, ComponentLink6URL=https://datasheet.ciiva.com/22768/1693457-22768649.pdf?src-supplier=Farnell, Dielectric Material=Ceramic, Height=0.5mm, JESD-609 Code=e3, Length=1mm, Mount="Surface Mount", Multilayer=Yes, Number of Pins=2, Packaging="Tape and Reel", Positive Tolerance=10%, Pricing 1="1=0.10000, 10=0.04000, 50=0.02180, 100=0.01780, 500=0.01270, 1000=0.00998, 2500=0.00908, 5000=0.00835 (USD)", RoHS=Yes, Size Code=0402, Stock 1=17621987, Supplier 1=Digi-Key, Terminal Finish=Nickel, Termination=Wraparound, Width=0.5mm
C22: library part C-0402(1005), "Ceramic Capacitor, Multilayer, Ceramic, 50V, 10% +Tol, 10% -Tol, C0G, 30ppm/Cel TC, 0.000001uF, Surface Mount, 0402", Capacitor Type=Ceramic, Manufacturer=Murata, Manufacturer Part Number=GCQ1555C1H1R0BB01D, Max Operating Temperature=125°C, Min Operating Temperature=-55°C, Negative Tolerance=10%, Package Shape=Rectangular, Rated DC Voltage (URdc)=50V, Supplier Part Number 1=490-GCQ1555C1H1R0BB01DCT-ND, Temperature Characteristics Code=C0G, Capacitance=1pF, Category="Ceramic Capacitors", ComponentLink1Description=https://datasheet.ciiva.com:443/pdfs/VipMasterIC/IC/MURE/MURE-S-A0004442191/MURE-S-A0004444577-1.pdf?src-supplier=IHS+Markit, ComponentLink1URL=https://datasheet.ciiva.com:443/pdfs/VipMasterIC/IC/MURE/MURE-S-A0004442191/MURE-S-A0004444577-1.pdf?src-supplier=IHS+Markit, ComponentLink2Description=http://search.murata.co.jp/Ceramy/image/img/A01X/G101/ENG/GCQ1555C1H1R0BB01-01.pdf?src-supplier=Digi-Key, ComponentLink2URL=http://search.murata.co.jp/Ceramy/image/img/A01X/G101/ENG/GCQ1555C1H1R0BB01-01.pdf?src-supplier=Digi-Key, Dielectric Material=Ceramic, Mount="Surface Mount", Multilayer=Yes, Number of Pins=2, Packaging="Tape and Reel", Positive Tolerance=10%, Pricing 1="1=0.33000, 10=0.22600, 50=0.15100, 100=0.12830, 500=0.09056, 1000=0.07923, 2500=0.07546, 5000=0.06980 (USD)", REACH SVHC=Yes, Reference Standard=AEC-Q200, RoHS=Yes, RoHS Compliant=Yes, Size Code=0402, Stock 1=7250, Supplier 1=Digi-Key, Termination=Wraparound
C23: library part C-0402(1005)
C24: library part C-0402(1005), "Ceramic Capacitor, Multilayer, Ceramic, 50V, 10% +Tol, 10% -Tol, X7R, 15% TC, 0.047uF, Surface Mount, 0402", Capacitor Type=Ceramic, Manufacturer=Murata, Manufacturer Part Number=GCM155R71H473KE02D, Max Operating Temperature=125°C, Min Operating Temperature=-55°C, Negative Tolerance=10%, Package Shape=Rectangular, Package Style=SMTMeter, Rated DC Voltage (URdc)=50V, Supplier Part Number 1=490-13297-1-ND, Temperature Characteristics Code=X7R, Capacitance=47nF, Category="Ceramic Capacitors", ComponentLink1Description=https://datasheet.ciiva.com/169/product-169683.pdf, ComponentLink1URL=https://datasheet.ciiva.com/169/product-169683.pdf, ComponentLink2Description=https://datasheet.ciiva.com:443/pdfs/VipMasterIC/IC/MURE/MURE-S-A0004370842/MURE-S-A0004372843-1.pdf?src-supplier=IHS+Markit, ComponentLink2URL=https://datasheet.ciiva.com:443/pdfs/VipMasterIC/IC/MURE/MURE-S-A0004370842/MURE-S-A0004372843-1.pdf?src-supplier=IHS+Markit, ComponentLink3Description=http://www.mouser.com/ds/2/281/c03e-806517.pdf?src-supplier=Mouser, ComponentLink3URL=http://www.mouser.com/ds/2/281/c03e-806517.pdf?src-supplier=Mouser, ComponentLink4Description=http://www.murata.com/~/media/webrenewal/support/library/catalog/products/capacitor/mlcc/c03e.ashx?src-supplier=Digi-Key, ComponentLink4URL=http://www.murata.com/~/media/webrenewal/support/library/catalog/products/capacitor/mlcc/c03e.ashx?src-supplier=Digi-Key, ComponentLink5Description=http://search.murata.co.jp/Ceramy/image/img/A01X/G101/ENG/GCM155R71H473KE02-01.pdf?src-supplier=Digi-Key, ComponentLink5URL=http://search.murata.co.jp/Ceramy/image/img/A01X/G101/ENG/GCM155R71H473KE02-01.pdf?src-supplier=Digi-Key, ComponentLink6Description=http://search.murata.co.jp/Ceramy/image/img/A01X/partnumbering_e_02.pdf?src-supplier=Digi-Key, ComponentLink6URL=http://search.murata.co.jp/Ceramy/image/img/A01X/partnumbering_e_02.pdf?src-supplier=Digi-Key, Dielectric Material=Ceramic, Height=0.55mm, JESD-609 Code=e3, Length=1mm, Mount="Surface Mount", Multilayer=Yes, Number of Pins=2, Packaging="Tape and Reel", Positive Tolerance=10%, Pricing 1="1=0.10000, 10=0.05300, 50=0.02900, 100=0.02370, 500=0.01694, 1000=0.01331, 2500=0.01210, 5000=0.01113 (USD)", REACH SVHC=Yes, Reference Standard=AEC-Q200, RoHS=Yes, RoHS Compliant=Yes, Size Code=0402, Stock 1=809, Supplier 1=Digi-Key, Terminal Finish=Nickel, Termination=Wraparound, Width=0.5mm
C28: library part C-0402(1005), "Ceramic Capacitor, Multilayer, Ceramic, 6.3V, 20% +Tol, 20% -Tol, X5R, 15% TC, 4.7uF, Surface Mount, 0402", Capacitor Type=Ceramic, Manufacturer=Murata, Manufacturer Part Number=GRM155R60J475ME87J, Max Operating Temperature=85°C, Min Operating Temperature=-55°C, Negative Tolerance=20%, Package Shape=Rectangular, Package Style=SMTMeter, Rated DC Voltage (URdc)=6.3V, Supplier Part Number 1=490-18211-1-ND, Temperature Characteristics Code=X5R, Capacitance=4.7uF, Category="Ceramic Capacitors", ComponentLink1Description=https://datasheet.ciiva.com/169/product-169683.pdf, ComponentLink1URL=https://datasheet.ciiva.com/169/product-169683.pdf, ComponentLink2Description=https://datasheet.ciiva.com:443/pdfs/VipMasterIC/IC/MURE/MURE-S-A0004362469/MURE-S-A0004364141-1.pdf?src-supplier=IHS+Markit, ComponentLink2URL=https://datasheet.ciiva.com:443/pdfs/VipMasterIC/IC/MURE/MURE-S-A0004362469/MURE-S-A0004364141-1.pdf?src-supplier=IHS+Markit, ComponentLink3Description=https://search.murata.co.jp/Ceramy/image/img/A01X/G101/ENG/GRM155R60J475ME87-01.pdf?src-supplier=Digi-Key, ComponentLink3URL=https://search.murata.co.jp/Ceramy/image/img/A01X/G101/ENG/GRM155R60J475ME87-01.pdf?src-supplier=Digi-Key, Dielectric Material=Ceramic, Height=0.5mm, JESD-609 Code=e3, Length=1mm, Mount="Surface Mount", Multilayer=Yes, Number of Pins=2, Packaging="Tape and Reel", Positive Tolerance=20%, Pricing 1="1=0.15000, 10=0.10500, 50=0.05980, 100=0.04950, 500=0.03472, 1000=0.02875, 2500=0.02676, 5000=0.02448 (USD)", REACH SVHC=Yes, RoHS=Yes, RoHS Compliant=Yes, Size Code=0402, Stock 1=105828, Supplier 1=Digi-Key, Terminal Finish=Nickel, Termination=Wraparound, Width=0.5mm
C29: library part C-0402(1005), "Ceramic Capacitor, Multilayer, Ceramic, 50V, 10% +Tol, 10% -Tol, X7R, 15% TC, 0.0068uF, Surface Mount, 0402", Capacitor Type=Ceramic, Manufacturer=Murata, Manufacturer Part Number=GCM155R71H682KA55D, Max Operating Temperature=125°C, Min Operating Temperature=-55°C, Negative Tolerance=10%, Package Shape=Rectangular, Package Style=SMTMeter, Rated DC Voltage (URdc)=50V, Supplier Part Number 1=490-11152-1-ND, Temperature Characteristics Code=X7R, Capacitance=6.8nF, Category="Ceramic Capacitors", ComponentLink1Description=https://datasheet.ciiva.com/169/product-169683.pdf, ComponentLink1URL=https://datasheet.ciiva.com/169/product-169683.pdf, ComponentLink2Description=https://datasheet.ciiva.com:443/pdfs/VipMasterIC/IC/MURE/MURE-S-A0004370842/MURE-S-A0004371992-1.pdf?src-supplier=IHS+Markit, ComponentLink2URL=https://datasheet.ciiva.com:443/pdfs/VipMasterIC/IC/MURE/MURE-S-A0004370842/MURE-S-A0004371992-1.pdf?src-supplier=IHS+Markit, ComponentLink3Description=https://datasheet.ciiva.com/163/s0717e-163461.pdf?src-supplier=Digi-Key, ComponentLink3URL=https://datasheet.ciiva.com/163/s0717e-163461.pdf?src-supplier=Digi-Key, Dielectric Material=Ceramic, Height=0.55mm, JESD-609 Code=e3, Length=1mm, Mount="Surface Mount", Multilayer=Yes, Number of Pins=2, Packaging="Tape and Reel", Positive Tolerance=10%, Pricing 1="1=0.10000, 10=0.04500, 50=0.02460, 100=0.02020, 500=0.01440, 1000=0.01131, 2500=0.01028, 5000=0.00946 (USD)", REACH SVHC=Yes, Reference Standard=AEC-Q200, RoHS=Yes, RoHS Compliant=Yes, Size Code=0402, Stock 1=86177, Supplier 1=Digi-Key, Terminal Finish=Nickel, Termination=Wraparound, Width=0.5mm
D1: library part LED_0402(1005), "Single Color LED, Super Bright Orange, Water Clear, 0.8mm", Case Code (Imperial)=0402, Case Code (Metric)=1005, Forward Current=20mA, Forward Voltage=2.1V, Lens Color=Clear, Manufacturer=Kingbright, Manufacturer Part Number=APHHS1005SECK, Max Operating Temperature=85°C, Min Operating Temperature=-40°C, Package Quantity=2000, Supplier Part Number 1=754-1103-1-ND, Case/Package=0402, Category=LEDs, Color=Orange, ComponentLink1Description=https://datasheet.ciiva.com:443/pdfs/VipMasterIC/IC/KNGB/KNGBS06640/KNGBS06640-1.pdf?src-supplier=IHS+Markit, ComponentLink1URL=https://datasheet.ciiva.com:443/pdfs/VipMasterIC/IC/KNGB/KNGBS06640/KNGBS06640-1.pdf?src-supplier=IHS+Markit, ComponentLink2Description=https://datasheet.ciiva.com/2114/aphhs1005seck-2114149.pdf?src-supplier=Digi-Key, ComponentLink2URL=https://datasheet.ciiva.com/2114/aphhs1005seck-2114149.pdf?src-supplier=Digi-Key, ComponentLink3Description=https://datasheet.ciiva.com/4688/aphhs1005seck-36485-4688716.pdf?src-supplier=Mouser, ComponentLink3URL=https://datasheet.ciiva.com/4688/aphhs1005seck-36485-4688716.pdf?src-supplier=Mouser, ComponentLink4Description=https://datasheet.ciiva.com/2114/aphhs1005seck-2114150.pdf?src-supplier=Digi-Key, ComponentLink4URL=https://datasheet.ciiva.com/2114/aphhs1005seck-2114150.pdf?src-supplier=Digi-Key, ComponentLink5Description=https://datasheet.ciiva.com/2114/aphhs1005seck-2114151.pdf?src-supplier=Digi-Key, ComponentLink5URL=https://datasheet.ciiva.com/2114/aphhs1005seck-2114151.pdf?src-supplier=Digi-Key, ComponentLink6Description=https://datasheet.ciiva.com/16412/aphhs1005seck-16412186.pdf?src-supplier=Future+Electronics, ComponentLink6URL=https://datasheet.ciiva.com/16412/aphhs1005seck-16412186.pdf?src-supplier=Future+Electronics, Dominant Wavelength=601nm, Height=0.6mm, Illumination Color=Orange, Lead Free="Lead Free", Length=1mm, Lens Style=Clear,Flat, Luminous Intensity=240mcd, Mount="Surface Mount", Number of LEDs=1, Number of Pins=2, Packaging="Tape and Reel", Pricing 1="1=0.50000, 10=0.35400, 100=0.20650, 500=0.14160, 1000=0.11800 (USD)", RoHS=Yes, Stock 1=18062, Supplier 1=Digi-Key, Test Current=20mA, Viewing Angle=120°, Wavelength=601nm, Width=0.5mm
D2: library part LED_0402(1005), "Single Color LED, Hyper Red, Water Clear, 0.8mm", Case Code (Imperial)=0402, Case Code (Metric)=1005, Forward Current=20mA, Forward Voltage=1.95V, Lens Color=Clear, Manufacturer=Kingbright, Manufacturer Part Number=APHHS1005SURCK, Max Operating Temperature=85°C, Min Operating Temperature=-40°C, Package Quantity=2000, Supplier Part Number 1=754-1104-1-ND, Case/Package=0402, Category=LEDs, Color=Red, ComponentLink1Description=https://datasheet.ciiva.com:443/pdfs/VipMasterIC/IC/KBEC/KBEC-S-A0008947180/KBEC-S-A0008958151-1.pdf?src-supplier=IHS+Markit, ComponentLink1URL=https://datasheet.ciiva.com:443/pdfs/VipMasterIC/IC/KBEC/KBEC-S-A0008947180/KBEC-S-A0008958151-1.pdf?src-supplier=IHS+Markit, ComponentLink2Description=https://datasheet.ciiva.com/4689/aphhs1005surck-32322-4689068.pdf?src-supplier=Mouser, ComponentLink2URL=https://datasheet.ciiva.com/4689/aphhs1005surck-32322-4689068.pdf?src-supplier=Mouser, ComponentLink3Description=https://datasheet.ciiva.com/2114/aphhs1005surck-2114140.pdf?src-supplier=Digi-Key, ComponentLink3URL=https://datasheet.ciiva.com/2114/aphhs1005surck-2114140.pdf?src-supplier=Digi-Key, ComponentLink4Description=https://datasheet.ciiva.com/14603/70062833-14603899.pdf?src-supplier=Allied+Electronics, ComponentLink4URL=https://datasheet.ciiva.com/14603/70062833-14603899.pdf?src-supplier=Allied+Electronics, ComponentLink5Description=https://datasheet.ciiva.com/2114/aphhs1005surck-2114142.pdf?src-supplier=Digi-Key, ComponentLink5URL=https://datasheet.ciiva.com/2114/aphhs1005surck-2114142.pdf?src-supplier=Digi-Key, ComponentLink6Description=https://datasheet.ciiva.com/2114/aphhs1005surck-2114141.pdf?src-supplier=Digi-Key, ComponentLink6URL=https://datasheet.ciiva.com/2114/aphhs1005surck-2114141.pdf?src-supplier=Digi-Key, Dominant Wavelength=630nm, Height=0.6mm, Illumination Color=Red, Lead Free="Lead Free", Length=1mm, Lens Style=Clear,Flat, Luminous Intensity=220mcd, Mount="Surface Mount", Number of LEDs=1, Number of Pins=2, Packaging="Tape and Reel", Pricing 1="1=0.50000, 10=0.35400, 100=0.20650, 500=0.14160, 1000=0.11800 (USD)", RoHS=Yes, Stock 1=12156, Supplier 1=Digi-Key, Test Current=20mA, Viewing Angle=120°, Wavelength=635nm, Width=0.5mm
D3: library part LED_0402(1005), "Single Color LED, Super Bright Yellow, Water Clear, 0.8mm", Case Code (Imperial)=0402, Case Code (Metric)=1005, Forward Current=20mA, Forward Voltage=2V, Lens Color=Clear, Manufacturer=Kingbright, Manufacturer Part Number=APHHS1005SYCK, Max Operating Temperature=85°C, Min Operating Temperature=-40°C, Package Quantity=2000, Supplier Part Number 1=754-1105-1-ND, Case/Package=0402, Category=LEDs, Color=Yellow, ComponentLink1Description=https://datasheet.ciiva.com:443/pdfs/VipMasterIC/IC/KBEC/KBEC-S-A0008947180/KBEC-S-A0008958019-1.pdf?src-supplier=IHS+Markit, ComponentLink1URL=https://datasheet.ciiva.com:443/pdfs/VipMasterIC/IC/KBEC/KBEC-S-A0008947180/KBEC-S-A0008958019-1.pdf?src-supplier=IHS+Markit, ComponentLink2Description=https://datasheet.ciiva.com/4688/aphhs1005syck-76875-4688936.pdf?src-supplier=Mouser, ComponentLink2URL=https://datasheet.ciiva.com/4688/aphhs1005syck-76875-4688936.pdf?src-supplier=Mouser, ComponentLink3Description=https://datasheet.ciiva.com/2114/aphhs1005syck-2114041.pdf?src-supplier=Digi-Key, ComponentLink3URL=https://datasheet.ciiva.com/2114/aphhs1005syck-2114041.pdf?src-supplier=Digi-Key, ComponentLink4Description=https://datasheet.ciiva.com/14603/70062834-14603866.pdf?src-supplier=Allied+Electronics, ComponentLink4URL=https://datasheet.ciiva.com/14603/70062834-14603866.pdf?src-supplier=Allied+Electronics, ComponentLink5Description=https://datasheet.ciiva.com/2114/aphhs1005syck-2114043.pdf?src-supplier=Digi-Key, ComponentLink5URL=https://datasheet.ciiva.com/2114/aphhs1005syck-2114043.pdf?src-supplier=Digi-Key, ComponentLink6Description=https://datasheet.ciiva.com/16412/aphhs1005syck-16412188.pdf?src-supplier=Future+Electronics, ComponentLink6URL=https://datasheet.ciiva.com/16412/aphhs1005syck-16412188.pdf?src-supplier=Future+Electronics, Dominant Wavelength=590nm, Height=0.6mm, Illumination Color=Yellow, Lead Free="Lead Free", Length=1mm, Lens Style=Clear,Flat, Luminous Intensity=150mcd, Mount="Surface Mount", Number of LEDs=1, Number of Pins=2, Packaging="Tape and Reel", Pricing 1="1=0.44000, 10=0.31200, 100=0.18200, 500=0.12480, 1000=0.10400 (USD)", RoHS=Yes, Stock 1=1790, Supplier 1=Digi-Key, Test Current=20mA, Viewing Angle=120°, Width=0.5mm
E1: "RF/Microwave Antenna, 2400MHz Min, 2500MHz Max", Manufacturer=Johanson, Manufacturer Part Number=2450AT18B100E, Max Operating Temperature=85°C, Min Operating Temperature=-40°C, Operating Frequency-Max=2.5MHz, Operating Frequency-Min=2.4MHz, Supplier Part Number 1=712-1006-1-ND, Category="RF Antennas", Characteristic Impedance=50R, ComponentLink1Description=https://datasheet.ciiva.com:443/pdfs/VipMasterIC/IC/JOHA/JOHAS00625/JOHAS00625-1.pdf?src-supplier=IHS+Markit, ComponentLink1URL=https://datasheet.ciiva.com:443/pdfs/VipMasterIC/IC/JOHA/JOHAS00625/JOHAS00625-1.pdf?src-supplier=IHS+Markit, ComponentLink2Description=https://datasheet.ciiva.com/24025/antenna-2450at18b100-242422-24025839.pdf?src-supplier=Mouser, ComponentLink2URL=https://datasheet.ciiva.com/24025/antenna-2450at18b100-242422-24025839.pdf?src-supplier=Mouser, ComponentLink3Description=https://datasheet.ciiva.com/1124/1318299-1124918.pdf?src-supplier=Element14, ComponentLink3URL=https://datasheet.ciiva.com/1124/1318299-1124918.pdf?src-supplier=Element14, Construction=COMPONENT, JESD-609 Code=e3, Pricing 1="1=0.56000, 10=0.49500, 25=0.46520, 100=0.37950, 250=0.35252, 500=0.30000, 1000=0.24000 (USD)", RF/Microwave Device Type=ANTENNA-OTHER, RoHS=Yes, Supplier 1=Digi-Key, Terminal Finish=Tin
F1: "Ceramic LPF", Manufacturer=Johanson, Manufacturer Part Number=2450FM07A0029T, Supplier Part Number 1=712-1623-1-ND, ComponentLink1Description=https://datasheet.ciiva.com:443/pdfs/VipMasterIC/IC/JOHA/JOHA-S-A0003593257/JOHA-S-A0003593257-1.pdf?src-supplier=IHS+Markit, ComponentLink1URL=https://datasheet.ciiva.com:443/pdfs/VipMasterIC/IC/JOHA/JOHA-S-A0003593257/JOHA-S-A0003593257-1.pdf?src-supplier=IHS+Markit, ComponentLink2Description=https://www.johansontechnology.com/datasheets/baluns/2450FM07A0029.pdf?src-supplier=Mouser, ComponentLink2URL=https://www.johansontechnology.com/datasheets/baluns/2450FM07A0029.pdf?src-supplier=Mouser, ComponentLink3Description=https://www.johansontechnology.com/datasheets/2450FM07A0029/2450FM07A0029.pdf?src-supplier=Digi-Key, ComponentLink3URL=https://www.johansontechnology.com/datasheets/2450FM07A0029/2450FM07A0029.pdf?src-supplier=Digi-Key, Filter Type="CERAMIC LPF", Pricing 1="1=0.26000, 10=0.23200, 25=0.21000, 100=0.18380, 250=0.16124, 500=0.14250, 1000=0.11250 (USD)", REACH SVHC=Yes, RoHS=No, RoHS Compliant=No, Stock 1=185913, Supplier 1=Digi-Key
J1 J2: "SMD CONNECTOR FOR ECG"
J3: library part SMD_BATTERY_CONNECTOR, "Lithium Battery 3.7V 40mAh Rechargeable"